# EAGLE board C3 (EAGLE 7.5.0)
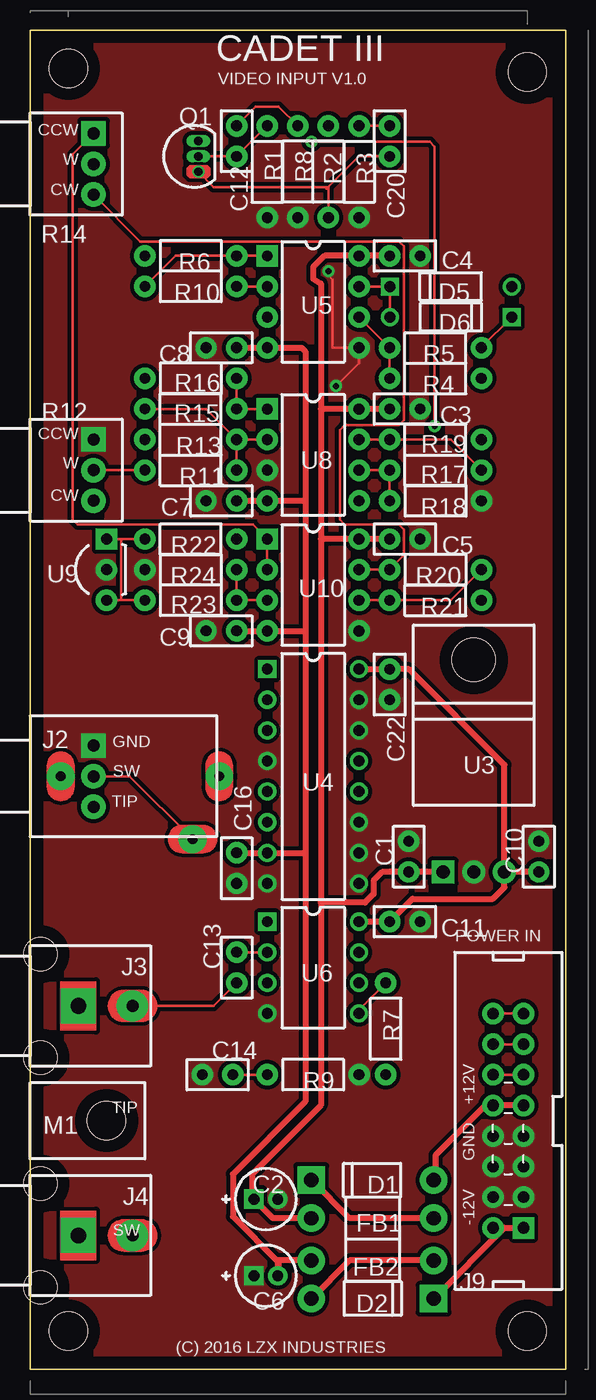
[diagram p0: board, top side]
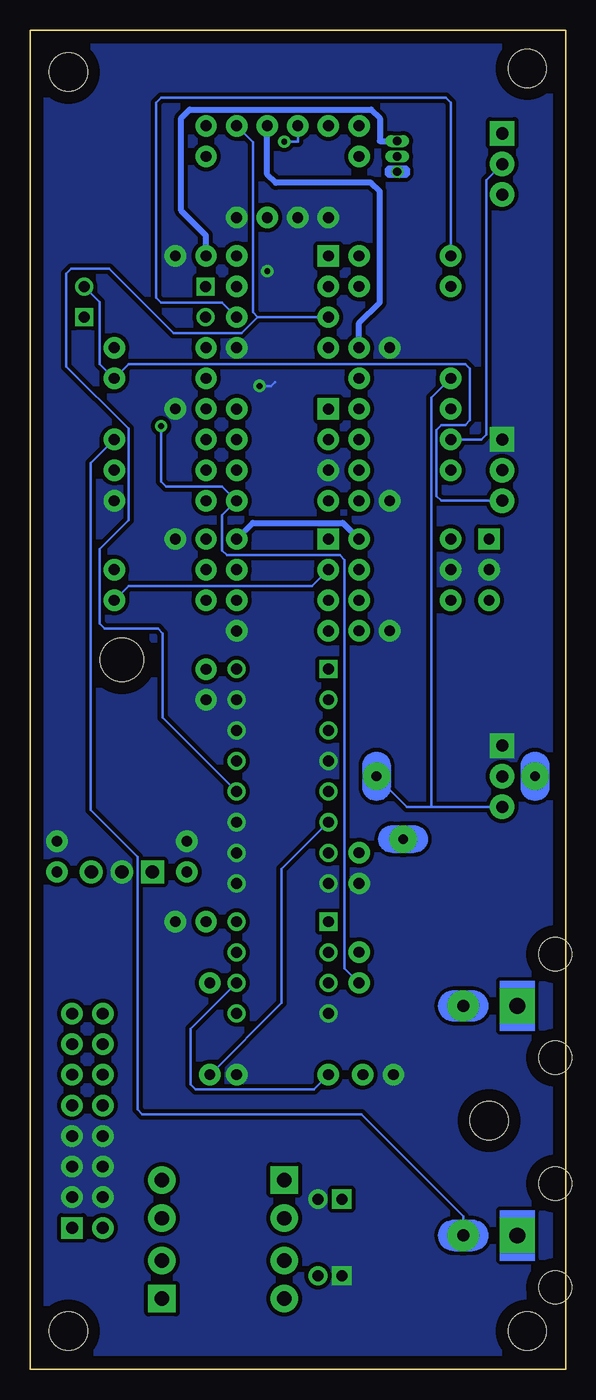
[diagram p1: board, bottom side, seen from below]

Size 44.45 x 111.12 mm. Coordinates in mm from the lower left corner, seen from the top.
Outline: 0,0 44.45,0 44.45,111.12 0,111.12 0,0
Copper layers (1*16): Top 0.035mm / dielectric 1.5mm / Bottom 0.035mm
Design rules "default *": minimum track width 10mil, minimum drill 0.61mm, track to track 8mil, track to pad 8mil, pad to pad 8mil, via to via 8mil, smd to smd 8mil, copper to edge 40mil, drill to drill 8mil, minimum pad ring 0mil, minimum via ring 8mil, stop-mask expansion 2mil, vias tented up to drill 19mil, thermal gap 10mil
Net classes: 0 Default: width 0.203 mm, clearance 0.203 mm, clearance 0.203 mm to class 1; 1 Power Rails: width 0.508 mm, clearance 0.203 mm, clearance 0.203 mm to class 0
Holes 3.17 mm at 3.17,3.17 3.17,107.95 41.27,3.17 41.27,107.63

## Footprints (pad centres in the part's own frame; a part is rotated, then mirrored left to right if it is on the bottom)
CAP-2.54/6.6x3 = drill 0.889 pad 1.778: 1 -1.27,0; 2 1.27,0
CAPPR-2/5.08 = drill 0.9 pad 1.6 square: 1 -0.991,0 | drill 0.9 pad 1.6: 2 0.991,0
CAP-2.54/6.6x3_C3 = drill 0.889 pad 1.778: 1 -1.27,0; 2 1.27,0
CAPPR-2/5.08_C6 = drill 0.9 pad 1.6 square: 1 -0.991,0 | drill 0.9 pad 1.6: 2 0.991,0
CAP-2.54/6.6x3_C7 = drill 0.889 pad 1.778: 1 -1.27,0; 2 1.27,0
CAP-2.54/6.6x3_C12 = drill 0.889 pad 1.778: 1 -1.27,0; 2 1.27,0
CAP-2.54/6.6x3_C13 = drill 0.889 pad 1.778: 1 -1.27,0; 2 1.27,0
CAP-2.54/6.6x3_C16 = drill 0.889 pad 1.778: 1 -1.27,0; 2 1.27,0
CAP-2.54/6.6x3_C20 = drill 0.889 pad 1.778: 1 -1.27,0; 2 1.27,0
DO-41 = drill 1.2 pad 2.286 square: 1 -5.08,0 | drill 1.2 pad 2.286: 2 5.08,0
DO-41_D2 = drill 1.2 pad 2.286 square: 1 -5.08,0 | drill 1.2 pad 2.286: 2 5.08,0
DO-35 = drill 0.9 pad 1.5 square: 1 -5.05,0 | drill 0.9 pad 1.5: 2 5.05,0
DO-35_D6 = drill 0.9 pad 1.5 square: 1 -5.05,0 | drill 0.9 pad 1.5: 2 5.05,0
FB-10.16/4.45x3.5 = drill 1.194 pad 2.286: 1 -5.08,0; 2 5.08,0
PJ302M = drill 0.8 pad 2.286: 1A 2.54,0; 2A 13.487,-5.207; 3A 15.697,0 | drill 1 pad 2.032 square: 1B 5.258,2.54 | drill 1 pad 2.032: 2B 5.258,0; 3B 5.258,-2.54
RCJ-04X = drill 1.3 pad 2.9 square: 1 0,4 | drill 1 pad 2.6: 2 0,8.5 | hole 2.75: 4.3,0.85; -4.3,0.85
IDC16M = drill 0.965 pad 1.778 square: 1 8.89,1.27 | drill 0.965 pad 1.778: 2 8.89,-1.27; 3 6.35,1.27; 4 6.35,-1.27; 5 3.81,1.27; 6 3.81,-1.27; 7 1.27,1.27; 8 1.27,-1.27; 9 -1.27,1.27; 10 -1.27,-1.27; 11 -3.81,1.27; 12 -3.81,-1.27; 13 -6.35,1.27; 14 -6.35,-1.27; 15 -8.89,1.27; 16 -8.89,-1.27
KEYSTONE621 = hole 3.175: 0,6.35
TO-92 = drill 0.7 pad 1: 1 -1.27,0 | drill 0.7 pad 1 long: 2 0,0; 3 1.27,0
RES-7.62/5.1x2.5 = drill 0.889 pad 1.778: 1 -3.81,0; 2 3.81,0
RES-7.62/5.1x2.5_R2 = drill 0.889 pad 1.778: 1 -3.81,0; 2 3.81,0
ALPHA9H = drill 1 pad 2.032 square: 1 5.258,2.54 | drill 1 pad 2.032: 2 5.258,0; 3 5.258,-2.54
ALPHA9H_R14 = drill 1 pad 2.032 square: 1 5.258,2.54 | drill 1 pad 2.032: 2 5.258,0; 3 5.258,-2.54
TO-220H = drill 1.1 pad 1.9 square: 1 -2.54,0 | drill 1.1 pad 1.9: 2 0,0; 3 2.54,0 | hole 3.6: 0,17.6
DIP-16 = drill 0.9 pad 1.5 square: 1 -3.81,8.89 | drill 0.9 pad 1.5: 2 -3.81,6.35; 3 -3.81,3.81; 4 -3.81,1.27; 5 -3.81,-1.27; 6 -3.81,-3.81; 7 -3.81,-6.35; 8 -3.81,-8.89; 9 3.81,-8.89; 10 3.81,-6.35; 11 3.81,-3.81; 12 3.81,-1.27; 13 3.81,1.27; 14 3.81,3.81; 15 3.81,6.35; 16 3.81,8.89
DIP-8 = drill 0.9 pad 1.778 square: 1 -3.81,3.81 | drill 0.9 pad 1.778: 2 -3.81,1.27; 3 -3.81,-1.27; 4 -3.81,-3.81; 5 3.81,-3.81; 6 3.81,-1.27; 7 3.81,1.27; 8 3.81,3.81
DIP-8_U6 = drill 0.9 pad 1.5 square: 1 -3.81,3.81 | drill 0.9 pad 1.5: 2 -3.81,1.27; 3 -3.81,-1.27; 4 -3.81,-3.81; 5 3.81,-3.81; 6 3.81,-1.27; 7 3.81,1.27; 8 3.81,3.81
TO-92-100R = drill 0.889 pad 1.778 square: 1 2.54,0 | drill 0.889 pad 1.778: 2 0,0; 3 -2.54,0

## Placement (x,y rotation side)
C1  330n  [CAP-2.54/6.6x3]  31.43,42.54 90 top
C2  10u 25V  [CAPPR-2/5.08]  19.57,14.12 0 top
C3  100n  [CAP-2.54/6.6x3_C3]  31.11,79.69 0 top
C4  100n  [CAP-2.54/6.6x3_C3]  31.11,92.39 0 top
C5  100n  [CAP-2.54/6.6x3_C3]  31.11,68.9 0 top
C6  10u 25V  [CAPPR-2/5.08_C6]  19.57,7.77 0 top
C7  100n  [CAP-2.54/6.6x3_C7]  15.88,72.07 0 top
C8  100n  [CAP-2.54/6.6x3_C7]  15.88,84.77 0 top
C9  100n  [CAP-2.54/6.6x3_C7]  15.88,61.28 0 top
C10  100n  [CAP-2.54/6.6x3]  42.23,42.54 90 top
C11  100n  [CAP-2.54/6.6x3_C3]  31.11,37.15 0 top
C12  100n  [CAP-2.54/6.6x3_C12]  17.14,101.92 90 top
C13  100n  [CAP-2.54/6.6x3_C13]  17.14,33.34 90 top
C14  100n  [CAP-2.54/6.6x3_C13]  15.56,24.45 0 top
C16  100n  [CAP-2.54/6.6x3_C16]  17.14,41.59 90 top
C20  100n  [CAP-2.54/6.6x3_C20]  29.84,101.92 270 top
C22  100n  [CAP-2.54/6.6x3_C20]  29.84,56.83 270 top
D1  1N4001  [DO-41]  28.42,15.71 0 top
D2  1N4001  [DO-41_D2]  28.42,5.87 180 top
D5  1N5711  [DO-35]  34.92,89.85 0 top
D6  1N5711  [DO-35_D6]  34.92,87.31 180 top
FB1  68R  [FB-10.16/4.45x3.5]  28.42,12.54 180 top
FB2  68R  [FB-10.16/4.45x3.5]  28.42,9.04 180 top
J2  PJ302M  [PJ302M]  0,49.21 0 top
J3  RCJ-04X  [RCJ-04X]  0,30.16 270 top
J4  RCJ-04X  [RCJ-04X]  0,11.11 270 top
J9  2X8 PIN HEADER  [IDC16M]  39.69,20.63 270 top
M1  KEYSTONE621  [KEYSTONE621]  0,20.64 270 top
Q1  2N3904  [TO-92]  13.97,100.65 90 top
R1  100K  [RES-7.62/5.1x2.5]  19.68,99.38 270 top
R2  10K  [RES-7.62/5.1x2.5_R2]  24.77,99.38 90 top
R3  100K  [RES-7.62/5.1x2.5]  27.3,99.38 270 top
R4  1K  [RES-7.62/5.1x2.5_R2]  33.66,82.23 0 top
R5  1K  [RES-7.62/5.1x2.5_R2]  33.66,84.77 0 top
R6  1.4K  [RES-7.62/5.1x2.5]  13.34,92.39 180 top
R7  1K  [RES-7.62/5.1x2.5_R2]  29.53,28.26 90 top
R8  75R  [RES-7.62/5.1x2.5_R2]  22.23,99.38 90 top
R9  680K  [RES-7.62/5.1x2.5]  23.5,24.45 180 top
R10  1K  [RES-7.62/5.1x2.5]  13.34,89.85 180 top
R11  4.99K  [RES-7.62/5.1x2.5_R2]  13.34,74.61 0 top
R12  B10K  [ALPHA9H]  0,74.61 0 top
R13  10K  [RES-7.62/5.1x2.5_R2]  13.34,77.15 0 top
R14  B10K  [ALPHA9H_R14]  0,100.01 0 top
R15  10K  [RES-7.62/5.1x2.5_R2]  13.34,79.69 0 top
R16  499R  [RES-7.62/5.1x2.5]  13.34,82.23 180 top
R17  1K  [RES-7.62/5.1x2.5_R2]  33.66,74.61 0 top
R18  1K  [RES-7.62/5.1x2.5]  33.66,72.07 180 top
R19  75R  [RES-7.62/5.1x2.5_R2]  33.66,77.15 0 top
R20  1K  [RES-7.62/5.1x2.5]  33.66,66.36 180 top
R21  1K  [RES-7.62/5.1x2.5_R2]  33.66,63.82 0 top
R22  4.99K  [RES-7.62/5.1x2.5_R2]  13.34,68.9 0 top
R23  15K  [RES-7.62/5.1x2.5]  13.34,63.82 180 top
R24  10K  [RES-7.62/5.1x2.5]  13.34,66.36 180 top
U3  7805  [TO-220H]  36.83,41.27 0 top
U4  CD4053  [DIP-16]  23.5,49.21 0 top
U5  LM6172IN/NOPB  [DIP-8]  23.5,88.58 0 top
U6  LM1881  [DIP-8_U6]  23.5,33.34 0 top
U8  LM6172IN/NOPB  [DIP-8]  23.5,75.88 0 top
U9  TL431  [TO-92-100R]  6.35,66.36 90 top
U10  TL072P  [DIP-8]  23.5,65.09 0 top

## Library data of the parts
C1-C14 C16 C20 C22 D1 D2 J3 J4 J9 M1 R1-R11 R13 R15-R24 = common
D5 D6 = common; DATASHEET: http://datasheets.diptrace.com\fairchild\1N4148.pdf; MANUFACTURER: Fairchild
FB1 FB2 = common; MANUFACTURER: Fair-Rite
J2 = common; DATASHEET: http://www.thonk.co.uk/shop/pj302m/
Q1 = common; DATASHEET: http://datasheets.diptrace.com\fairchild\2N3904.pdf; MANUFACTURER: Fairchild
R12 R14 = common; DATASHEET: http://www.thonk.co.uk/shop/alpha-9mm-pots/; MANUFACTURER: Alpha
U3 = common; MANUFACTURER: Atmel
U4 = common; DATASHEET: http://datasheets.diptrace.com\fairchild\CD4051BC.pdf; MANUFACTURER: Fairchild
U5 U8 = common; DATASHEET: http://www.ti.com/lit/gpn/lm6172; MANUFACTURER: Texas Instruments
U6 = common; MANUFACTURER: National Semiconductor
U9 = common; DATASHEET: http://datasheets.diptrace.com\st_micro\CD00000986.pdf; MANUFACTURER: ST Microelectronics
U10 = common; DATASHEET: http://datasheets.diptrace.com\ti\TL07x.pdf; MANUFACTURER: Texas Instruments

## Nets
0V: C1.2 C2.2 C3.2 C4.2 C5.2 C6.1 C7.1 C8.1 C9.1 C10.2 C11.2 C14.1 C16.1 C22.2 J2.1A J2.1B J3.1 J4.1 J9.3 J9.4 J9.5 J9.6 J9.7 J9.8 R1.2 R3.2 R8.1 R9.1 R12.1 R18.1 R24.2 U3.2 U4.4 U4.8 U4.9 U4.10 U4.11 U4.14 U4.15 U5.5 U6.4 U8.3 U9.2 U10.5
+5V: C10.1 C11.1 C22.1 U3.3 U4.16 U6.8
+12V [Power Rails]: C1.1 C2.1 C3.1 C4.1 C5.1 FB1.2 Q1.3 R22.2 U3.1 U5.8 U8.8 U10.8
-12V [Power Rails]: C6.2 C7.2 C8.2 C9.2 C16.2 FB2.2 R2.2 U4.7 U5.4 U8.4 U10.4
BIAS_POT_OUT: R13.1 R14.2
Net_0: C20.2 Q1.1 R2.1
Net_1: D2.2 FB2.1
Net_2: D1.1 FB1.1
Net_3: C20.1 R3.1 U4.12 U5.3
Net_4: C13.2 U6.2
Net_5: D2.1 J9.1 J9.2
Net_6: R7.1 U4.6
Net_7: R10.1 U5.2
Net_8: J2.3A J2.3B R16.2
Net_9: R17.2 R19.1 U8.7
Net_10: R4.1 R5.1 R6.2 U5.6
Net_11: D5.2 R4.2 R12.3
Net_12: D6.1 R5.2
Net_13: R20.1 R21.1 U10.6
Net_14: J9.11 J9.12
Net_15: J9.13 J9.14
Net_16: J9.15 J9.16
Net_17: R14.1 R21.2 U10.1 U10.2
Net_18: R22.1 R23.2 U9.1 U9.3
Net_19: R14.3 R20.2 U10.7
Net_20: C12.1 Q1.2 R1.1
Net_21: J2.2A J2.2B
Net_22: D5.1 D6.2 U5.7
Net_30: R23.1 R24.1 U10.3
Net_33: D1.2 J9.9 J9.10
Net_34: C12.2 C13.1 J3.2 R8.2 U8.5
Net_35: C14.2 R9.2 U6.6
Net_36: R7.2 U6.5
Net_37: R6.1 R10.2 U5.1
Net_38: R11.1 R12.2
Net_39: R11.2 R13.2 R15.1 U8.2
Net_40: R15.2 R16.1 U8.1
Net_42: R17.1 R18.2 U8.6
Net_43: J4.2 R19.2

## Tracks (layer width: path | path; a pad name or v marks a point on that pad's centre or on a via)
0V  (via drill 0.48 pad 1.02)
  Top 0.203: v25.4,81.6 27.3,83.5 U5.5 25.08,84.77 25.08,90.41 24.77,90.8 v24.77,91.12
  Bottom 0.203: v25.4,81.6 24.45,81.6 24.13,81.91 | v24.77,91.12 25.08,91.12 25.08,91.44
  pour Top (isolate 0.33): 0.95,110.17 43.34,110.18 43.34,0.95 0.95,0.95 0.95,9.21
  pour Bottom (isolate 0.33): 0.95,110.17 43.34,110.18 43.34,0.95 0.95,0.95 0.95,9.21
+5V
  Top 0.203: U3.3 39.37,49.95 31.21,58.1
  Top 0.508: U6.8 C11.1 31.75,39.05 38.42,39.05 39.37,40 39.37,50.16 31.43,58.1 31.21,58.1 C22.1 U4.16 | C10.1 U3.3
+12V
  Top 0.508: FB1.2 20.16,12.54 C2.1 18.41,14.28 18.41,16.19 24.13,21.91 24.13,38.73 | C4.1 U5.8 24.45,92.39 23.5,91.44 23.5,90.49 24.13,90.1 24.13,79.69 | 24.13,79.69 24.13,68.9 | 24.13,68.9 24.13,38.73 | C3.1 U8.8 | U8.8 | U8.8 24.13,79.69 | C5.1 U10.8 | U10.8 | U10.8 24.13,68.9 | U3.1 C1.1 29.22,41.27 28.51,40.56 28.51,39.45 27.8,38.73 24.13,38.73 | U8.8
  Bottom 0.508: C4.1 29.84,94.09 31.9,96.15 31.9,103.82 31.19,104.53 16.14,104.53 15.43,103.82 15.43,101.92 Q1.3 | U10.8 25.96,70.24 18.49,70.24 R22.2
-12V
  Top 0.508: FB2.2 20.56,9.04 C6.2 20.64,7.85 20.64,8.89 16.83,12.7 16.83,16.19 22.86,22.22 22.86,42.86 | C8.2 U5.4 22.54,84.77 22.86,84.45 22.86,72.07 | 22.86,72.07 22.86,61.28 | 22.86,61.28 22.86,42.86 | U10.4 C9.2 U10.4 | U10.4 | U10.4 22.86,61.28 | C7.2 U8.4 | U8.4 | U8.4 22.86,72.07 | C16.2 U4.7 22.86,42.86 | U8.4 | U10.4 | U10.4 22.86,61.28
  Bottom 0.508: C8.2 17.14,86.81 15.43,88.53 15.43,97.75 16.14,98.46 24.05,98.46 24.77,99.17 R2.2
BIAS_POT_OUT
  Bottom 0.203: R13.1 6.99,77.15 6.58,77.56 6.58,98.69 R14.2
Net_0
  Top 0.203: R2.1 24.77,97.95 | 24.77,97.95 24.77,98.11 15.24,98.11 Q1.1 | C20.2 27.3,100.65 24.61,97.95 24.77,97.95
Net_1
  Top 0.508: FB2.1 26.52,9.04 D2.2
Net_2
  Top 0.508: FB1.1 26.51,12.54 D1.1
Net_3
  Top 0.203: R3.1 C20.1
  Bottom 0.203: R3.1 25.96,101.84 25.96,87.72 25.55,87.31 | 25.55,87.31 26.9,85.97 32.54,85.97 37.89,91.31 41.03,91.31 41.44,90.91 41.44,83.21 36.27,78.05 36.27,70.47 38.66,68.08 38.66,61.89 38.25,61.48 33.84,61.48 33.44,61.07 33.44,54.07 U4.12 | 25.55,87.31 23.01,87.31 | 23.01,87.31 | 23.01,87.31 U5.3
Net_4
  Top 0.203: U6.2 C13.2
Net_5
  Top 0.508: D2.1 39.37,11.74 J9.2 J9.1
Net_6
  Bottom 0.203: U4.6 23.57,41.52 23.57,30.4 R7.1
Net_7
  Top 0.203: R10.1 U5.2
Net_8
  Bottom 0.203: J2.3B 11.12,46.67 | 11.12,46.67 13.16,46.67 J2.3A | 11.12,46.67 11.12,80.63 R16.2
Net_9
  Top 0.203: U8.7 R19.1 34.92,77.15 R17.2
Net_10
  Top 0.203: U5.6 R5.1 R4.1
  Bottom 0.203: U5.6 28.5,88.51 33.58,88.51 33.98,88.91 33.98,105.09 33.58,105.5 9.93,105.5 9.53,105.09 R6.2
Net_11
  Bottom 0.203: D5.2 38.66,88.54 38.66,83.43 R4.2 36.27,83.43 8.33,83.43 7.92,83.02 7.92,78.75 8.33,78.35 10.31,78.35 10.72,77.94 10.72,72.48 10.31,72.07 R12.3
Net_12
  Top 0.203: R5.2 37.47,84.8 D6.1
Net_13
  Top 0.203: U10.6 R21.1 | R21.1 | R21.1 34.92,63.82 R20.1
Net_14
  Top 0.203: J9.12 J9.11
Net_15
  Top 0.203: J9.13 J9.14
Net_16
  Top 0.203: J9.15 J9.16
Net_17
  Top 0.203: U10.2 U10.1 18.49,70.09 3.94,70.09 3.53,70.5 3.53,100.82 R14.1
  Bottom 0.203: U10.2 21.03,65.01 36.27,65.01 R21.2
Net_18
  Top 0.203: U9.1 7.54,68.9 | 7.54,68.9 R22.1 | U9.3 7.54,63.82 | 7.54,63.82 R23.2 | 7.54,63.82 7.54,68.9
Net_19
  Top 0.203: U10.7 R20.2 | R20.2 | R20.2 31.04,67.55 31.04,69.68 30.63,70.09 26.11,70.09 25.7,70.5 25.7,77.94 26.11,78.35 30.63,78.35 31.04,78.75 31.04,93.18 30.63,93.59 9.14,93.59 R14.3
Net_20
  Top 0.203: Q1.2 C12.1 R1.1
Net_21
  Top 0.203: J2.2B 8.28,49.21 J2.2A
Net_22
  Top 0.203: U5.7 D5.1 D6.2
Net_30
  Top 0.203: U10.3 R23.1 | R23.1 | R23.1 R24.1
Net_33
  Top 0.508: J9.9 J9.10 37.78,21.9 33.66,17.78 33.66,15.87 D1.2
Net_34  (via drill 0.48 pad 1.02)
  Top 0.203: R8.2 20.64,104.77 18.73,104.77 C12.2 | J3.2 15.24,30.16 C13.1 | v23.36,101.87 33.17,101.87 33.58,101.46 v33.58,78.26
  Bottom 0.203: C13.1 18.34,33.26 18.34,67.14 18.75,67.55 28.09,67.55 28.5,67.96 28.5,70.88 U8.5 28.5,73.27 33.17,73.27 33.58,73.67 v33.58,78.26 | R8.2 22.23,101.87 v23.36,101.87
Net_35
  Top 0.203: C14.2 R9.2
  Bottom 0.203: R9.2 20.88,23.25 30.72,23.25 31.13,23.66 31.13,28.24 U6.6
Net_36
  Top 0.203: U6.5 27.3,29.84 R7.2
Net_37
  Top 0.203: U5.1 R6.1 12.06,92.39 R10.2
Net_38
  Top 0.203: R11.1 R12.2
Net_39
  Top 0.203: U8.2 R13.2 | R13.2 R11.2 | R15.1 14.61,79.69 R13.2
Net_40
  Top 0.203: U8.1 R15.2 R16.1
Net_42
  Top 0.203: U8.6 R17.1 R18.2
Net_43
  Bottom 0.203: J4.2 8.5,12.72 16.96,21.18 35.14,21.18 35.55,21.59 35.55,42.53 39.44,46.42 39.44,75.18 R19.2

## Text on the board
tPlace: CADET III | VIDEO INPUT V1.0 | CCW | Q1 | W | CW | R1 | R8 | R2 | R3 | C12 | C20 | R14 | R6 | C4 | R10 | D5 | U5 | D6 | C8 | R5 | R16 | R4 | CCW | R12 | R15 | C3 | W | R13 | R19 | U8 | R11 | R17 | CW | C7 | R18 | R22 | C5 | U9 | R24 | R20 | U10 | R23 | R21 | C9 | GND | J2 | SW | C22 | U3 | TIP | U4 | C16 | C1 | C10 | POWER IN | C11 | C13 | J3 | U6 | R7 | C14 | R9 | TIP | +12V | M1 | GND | C2 | D1 | J4 | SW | FB1 | -12V | FB2 | J9 | C6 | D2 | (C) 2016 LZX INDUSTRIES
tDocu: Q1 | R1 | R8 | R2 | R3 | C12 | C20 | R14 | R6 | C4 | R10 | D5 | U5 | D6 | C8 | R5 | R16 | R4 | R12 | R15 | C3 | R13 | R19 | U8 | R11 | R17 | C7 | R18 | R22 | C5 | U9 | R24 | R20 | U10 | R23 | R21 | C9 | J2 | C22 | U3 | U4 | C16 | C1 | C10 | C11 | C13 | J3 | U6 | R7 | C14 | R9 | M1 | C2 | D1 | J4 | FB1 | FB2 | J9 | C6 | D2